# EAGLE board Arac Yikama Otomati (EAGLE 9.7.0)

Size 243.57 x 96.71 mm. Coordinates in mm from the lower left corner, seen from the top.
Outline: 0,0 243.57,0 243.57,96.71 0,96.71 0,0
Copper layers (1*16): Top 0.035mm / dielectric 1.5mm / Bottom 0.035mm
Design rules "default": minimum track width 6mil, minimum drill 0.35mm, track to track 6mil, track to pad 6mil, pad to pad 6mil, via to via 6mil, smd to smd 6mil, copper to edge 40mil, drill to drill 6mil, minimum pad ring 10mil, minimum via ring 8mil, stop-mask expansion 4mil, vias tented up to drill 0mil, thermal gap 10mil

## Footprints (pad centres in the part's own frame; a part is rotated, then mirrored left to right if it is on the bottom)
LEDRD254W60D565H860B = drill 0.981 pad 1.581: 1 -1.27,0; 2 1.27,0
LEDRD254W60D565H860B_G = drill 0.981 pad 1.581: 1 -1.27,0; 2 1.27,0
RESAD1016W63L850D250B = drill 0.83 pad 1.43: 1 -5.08,0; 2 5.08,0
HA-06-SM065 = drill 1 pad 1.676: 1 -2.54,-2.54; 2 0,2.54; 3 2.54,-2.54
SWITCH-MOMENTARY-PTH-6.5MM = drill 1.016 pad 1.88: 1 -3.251,2.261; 2 3.251,2.261; 3 -3.251,-2.261; 4 3.251,-2.261
ARDUINO-UNO-R3-SHIELD = drill 1.016 pad 1.88: 3.3V 24.13,-2.54; 5V 24.13,0; A0 24.13,12.7; A1 24.13,15.24; A2 24.13,17.78; A3 24.13,20.32; A4 24.13,22.86; A5 24.13,25.4; AREF -24.13,-13.97; D2 -24.13,20.32; D3 -24.13,17.78; D4 -24.13,15.24; D5 -24.13,12.7; D6 -24.13,10.16; D7 -24.13,7.62; D8 -24.13,3.81; D9 -24.13,1.27; D10 -24.13,-1.27; D11 -24.13,-3.81; D12 -24.13,-6.35; D13 -24.13,-8.89; GND@0 24.13,2.54; GND@1 24.13,5.08; GND@2 -24.13,-11.43; IOREF 24.13,-7.62; NC 24.13,-10.16; RES 24.13,-5.08; RX -24.13,25.4; SCL -24.13,-19.05; SDA -24.13,-16.51; TX -24.13,22.86; VIN 24.13,7.62
JHD-162A = drill 1.016 long: 1 -19.05,0; 2 -16.51,0; 3 -13.97,0; 4 -11.43,0; 5 -8.89,0; 6 -6.35,0; 7 -3.81,0; 8 -1.27,0; 9 1.27,0; 10 3.81,0; 11 6.35,0; 12 8.89,0; 13 11.43,0; 14 13.97,0; 15 16.51,0; 16 19.05,0

## Placement (x,y rotation side)
D1  RED  [LEDRD254W60D565H860B]  178.17,75.41 180 top
D2  GREEN  [LEDRD254W60D565H860B_G]  185.79,75.41 180 top
R2  220  [RESAD1016W63L850D250B]  138.8,83.03 270 top
R6  1k  [RESAD1016W63L850D250B]  146.42,65.25 90 top
R7  1k  [RESAD1016W63L850D250B]  166.74,65.25 90 top
R8  1k  [RESAD1016W63L850D250B]  192.14,65.25 90 top
R9  1k  [RESAD1016W63L850D250B]  202.3,65.25 90 top
R10  1k  [RESAD1016W63L850D250B]  212.46,65.25 90 top
R11  1k  [RESAD1016W63L850D250B]  222.62,65.25 90 top
R12  1k  [RESAD1016W63L850D250B]  232.78,65.25 90 top
R13  220  [RESAD1016W63L850D250B]  179.44,67.79 90 top
R14  220  [RESAD1016W63L850D250B]  187.06,67.79 90 top
RPOT2  250k  [HA-06-SM065]  98.16,60.17 0 top
S1  SWITCH_MOMENTARY  [SWITCH-MOMENTARY-PTH-6.5MM]  235.32,76.68 90 top
S2  SWITCH_MOMENTARY  [SWITCH-MOMENTARY-PTH-6.5MM]  225.16,76.68 90 top
S3  SWITCH_MOMENTARY  [SWITCH-MOMENTARY-PTH-6.5MM]  215,76.68 90 top
S4  SWITCH_MOMENTARY  [SWITCH-MOMENTARY-PTH-6.5MM]  204.84,76.68 90 top
S5  SWITCH_MOMENTARY  [SWITCH-MOMENTARY-PTH-6.5MM]  194.68,76.68 90 top
S6  SWITCH_MOMENTARY  [SWITCH-MOMENTARY-PTH-6.5MM]  148.96,76.68 90 top
S7  SWITCH_MOMENTARY  [SWITCH-MOMENTARY-PTH-6.5MM]  169.28,76.68 90 top
U3  ARDUINO-UNO-R3-SHIELD  [ARDUINO-UNO-R3-SHIELD]  47.88,66.86 270 top
U4  LCD-16X2JHD-162A  [JHD-162A]  119.66,36.63 0 top

## Library data of the parts
D1 = Tinkercad; CATEGORY: Opto-Electronic; SUB-CATEGORY: LED; VALUE: LED_RED
D2 = Tinkercad; CATEGORY: Opto-Electronic; SUB-CATEGORY: LED; VALUE: LED_GREEN
R2 R6-R14 RPOT2 S1-S7 U3 U4 = Tinkercad

## Nets
D1_A: D1.1 R13.2
D2_A: D2.1 R14.2
U3_5V: R2.1 RPOT2.1 S1.3 S1.4 S2.3 S2.4 S3.3 S3.4 S4.3 S4.4 S5.3 S5.4 S6.3 S6.4 S7.3 S7.4 U3.5V U4.2
U3_A0: R9.2 S4.1 S4.2 U3.A0
U3_A1: R8.2 S5.1 S5.2 U3.A1
U3_A2: R7.2 S7.1 S7.2 U3.A2
U3_A3: R6.2 S6.1 S6.2 U3.A3
U3_D2: U3.D2 U4.14
U3_D3: U3.D3 U4.13
U3_D4: U3.D4 U4.12
U3_D5: U3.D5 U4.11
U3_D6: R13.1 U3.D6
U3_D7: R12.2 S1.1 S1.2 U3.D7
U3_D8: R11.2 S2.1 S2.2 U3.D8
U3_D9: R14.1 U3.D9
U3_D11: U3.D11 U4.6
U3_D12: U3.D12 U4.4
U3_D13: R10.2 S3.1 S3.2 U3.D13
U3_GND: D1.2 D2.2 R6.1 R7.1 R8.1 R9.1 R10.1 R11.1 R12.1 RPOT2.3 U3.GND@0 U3.GND@1 U3.GND@2 U4.1 U4.5 U4.16
U4_LED+: R2.2 U4.15
U4_VO: RPOT2.2 U4.3

## Tracks (layer width: path | path; a pad name or v marks a point on that pad's centre or on a via)
D1_A  (1 unrouted)
D2_A  (1 unrouted)
U3_5V  (17 unrouted)
U3_A0  (3 unrouted)
U3_A1  (3 unrouted)
U3_A2  (3 unrouted)
U3_A3  (3 unrouted)
U3_D2  (1 unrouted)
U3_D3  (1 unrouted)
U3_D4  (1 unrouted)
U3_D5  (1 unrouted)
U3_D6  (1 unrouted)
U3_D7  (3 unrouted)
U3_D8  (3 unrouted)
U3_D9  (1 unrouted)
U3_D11  (1 unrouted)
U3_D12  (1 unrouted)
U3_D13  (3 unrouted)
U3_GND  (15 unrouted)
U4_LED+  (1 unrouted)
U4_VO  (1 unrouted)